# EAGLE board untitled (EAGLE 5.11)
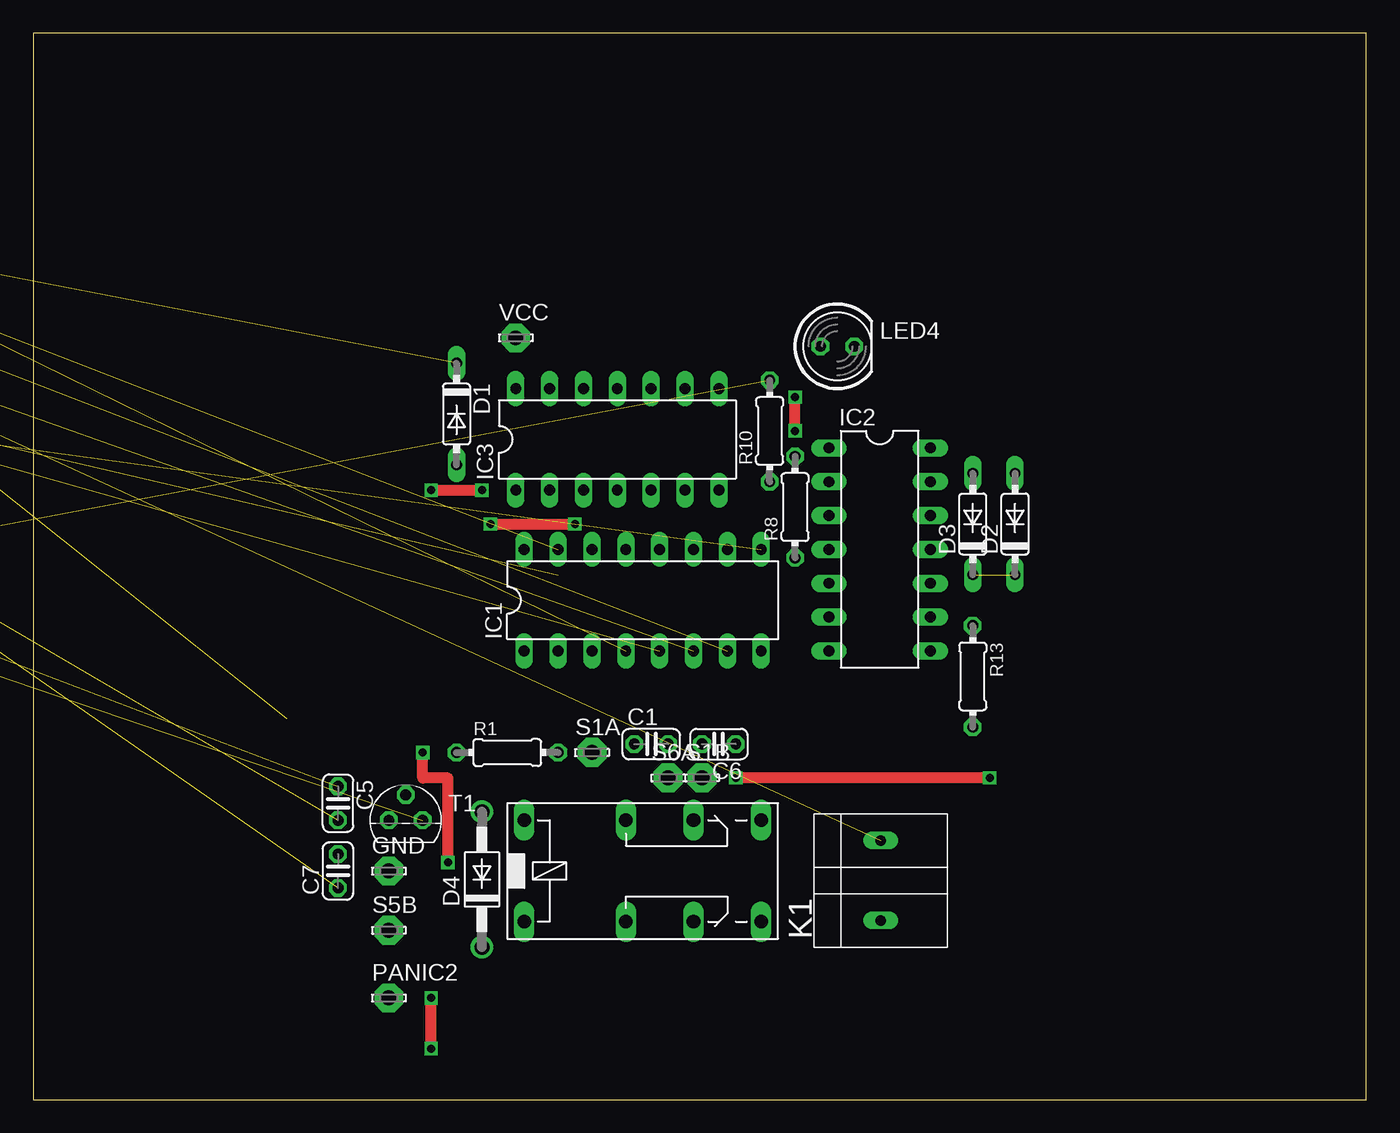
[diagram p0: board, top side]
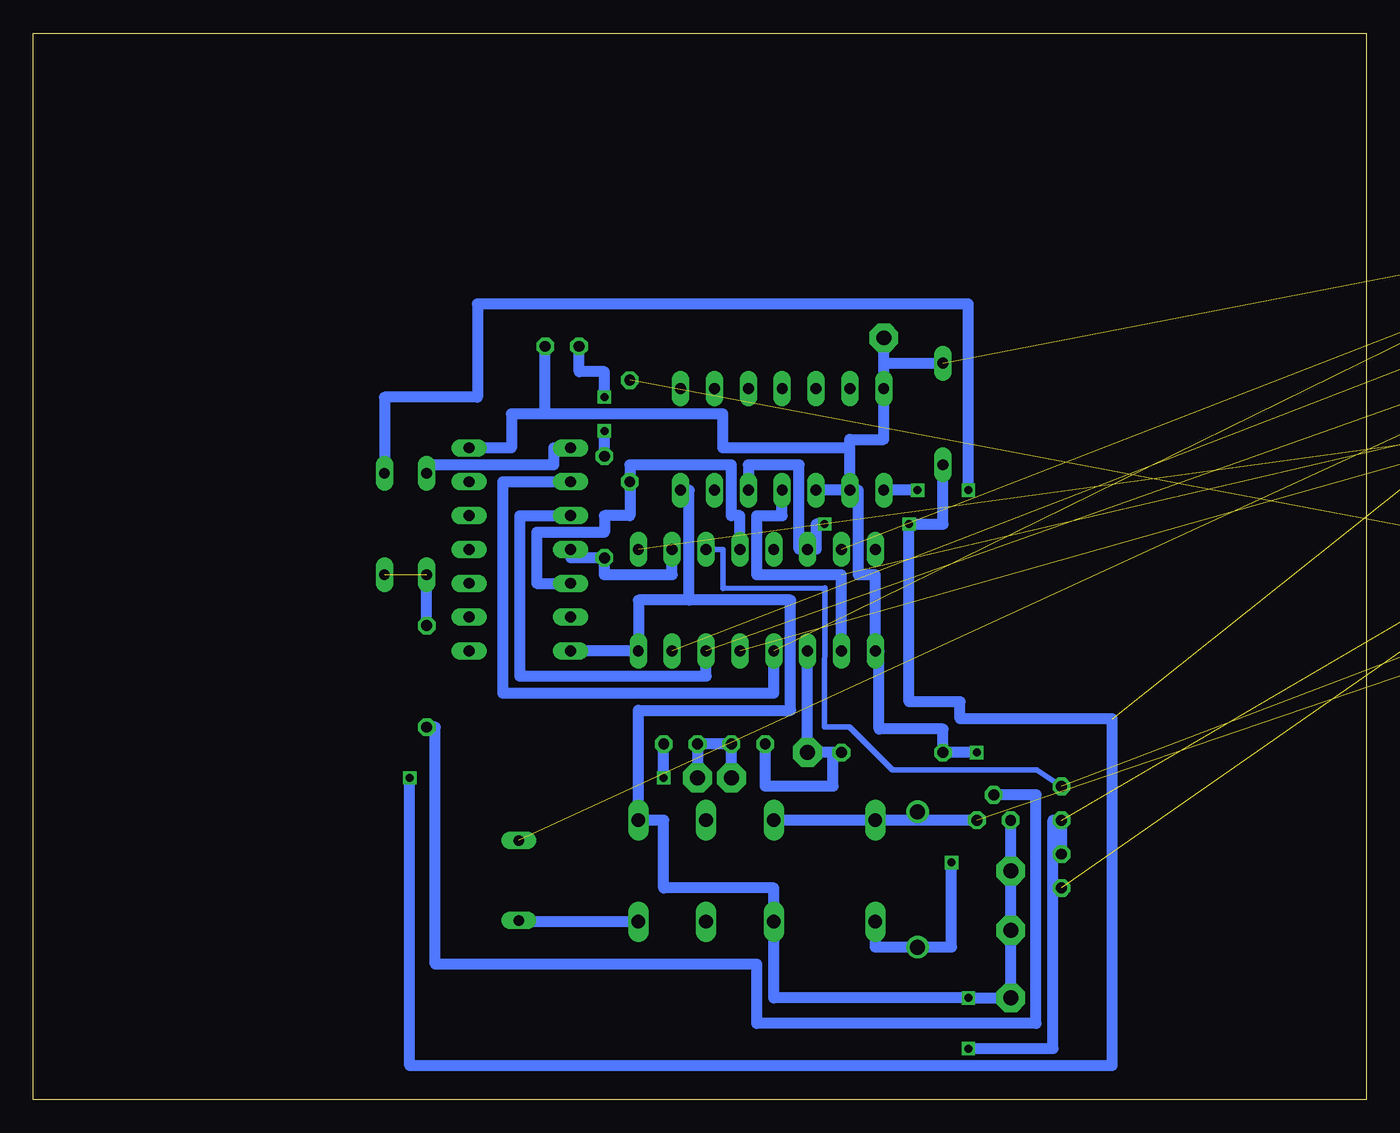
[diagram p1: board, bottom side, seen from below]

Size 100 x 80 mm. Coordinates in mm from the lower left corner, seen from the top.
Outline: 0,0 100,0 100,80 0,80 0,0
Copper layers (1*16): Top 0.035mm / dielectric 1.5mm / Bottom 0.035mm
Design rules "default": minimum track width 10mil, minimum drill 24mil, track to track 8mil, track to pad 8mil, pad to pad 8mil, via to via 8mil, smd to smd 8mil, copper to edge 40mil, drill to drill 8mil, minimum pad ring 10mil, minimum via ring 8mil, stop-mask expansion 4mil, vias tented up to drill 0mil, thermal gap 10mil

## Footprints (pad centres in the part's own frame; a part is rotated, then mirrored left to right if it is on the bottom)
BORNE_2_PCI = drill 0.8 long: P$1 -3.08,-0.08; P$2 2.92,-0.08
C025-024X044 = drill 0.813 octagon: 1 -1.27,0; 2 1.27,0
DO35-7 = drill 0.813 long: A 3.81,0; C -3.81,0
DO41-10 = drill 1.118 round: A 5.08,0; C -5.08,0
LSP11 = drill 1.118 pad 2.159 octagon: MP 0,0
DIL16 = drill 0.813 long: 1 -8.89,-3.81; 2 -6.35,-3.81; 3 -3.81,-3.81; 4 -1.27,-3.81; 5 1.27,-3.81; 6 3.81,-3.81; 7 6.35,-3.81; 8 8.89,-3.81; 9 8.89,3.81; 10 6.35,3.81; 11 3.81,3.81; 12 1.27,3.81; 13 -1.27,3.81; 14 -3.81,3.81; 15 -6.35,3.81; 16 -8.89,3.81
DIL14 = drill 0.813 long: 1 -7.62,-3.81; 2 -5.08,-3.81; 3 -2.54,-3.81; 4 0,-3.81; 5 2.54,-3.81; 6 5.08,-3.81; 7 7.62,-3.81; 8 7.62,3.81; 9 5.08,3.81; 10 2.54,3.81; 11 0,3.81; 12 -2.54,3.81; 13 -5.08,3.81; 14 -7.62,3.81
351 = drill 1.016 long: 1 -3.81,-3.81; 16 -3.81,3.81; O1 8.89,-3.81; O2 8.89,3.81; P1 3.81,-3.81; P2 3.81,3.81; S1 13.97,-3.81; S2 13.97,3.81
LED5MM = drill 0.813 octagon: A -1.27,0; K 1.27,0
0204/7 = drill 0.813 octagon: 1 -3.81,0; 2 3.81,0
TO92 = drill 0.813 octagon: 1 1.27,0; 2 0,1.905; 3 -1.27,0

## Placement (x,y rotation side)
BORNE_2_PCI1  BORNE_2_PCI  [BORNE_2_PCI]  63.5,16.51 90 top
C1  100n  [C025-024X044]  46.35,26.67 0 top
C2  100n  [C025-024X044]  -58.42,36.83 0 top  (outside the outline)
C3  100n  [C025-024X044]  -63.5,36.83 0 top  (outside the outline)
C4  100n  [C025-024X044]  -68.58,36.83 0 top  (outside the outline)
C5  100n  [C025-024X044]  22.86,22.23 270 top
C6  [C025-024X044]  51.44,26.67 180 top
C7  1uF  [C025-024X044]  22.86,17.14 90 top
D1  1N4148DO35-7  [DO35-7]  31.75,51.44 270 top
D2  1N4148DO35-7  [DO35-7]  73.66,43.18 90 top
D3  1N4148DO35-7  [DO35-7]  70.48,43.18 90 top
D4  1N4004  [DO41-10]  33.66,16.51 90 top
GND  LSP11  [LSP11]  26.67,17.14 0 top
IC1  4050N  [DIL16]  45.72,37.47 0 top
IC2  4072N  [DIL14]  63.5,41.27 270 top
IC3  4082N  [DIL14]  43.81,49.53 0 top
K1  351  [351]  40.64,17.14 0 top
LED1  [LED5MM]  -34.29,29.21 0 top  (outside the outline)
LED2  [LED5MM]  -46.99,29.21 0 top  (outside the outline)
LED3  [LED5MM]  -59.69,29.21 0 top  (outside the outline)
LED4  [LED5MM]  60.33,56.52 0 top
LED5  [LED5MM]  -34.29,36.83 0 top  (outside the outline)
LED6  [LED5MM]  -46.99,36.83 0 top  (outside the outline)
PANIC1  LSP11  [LSP11]  -54.61,49.53 0 top  (outside the outline)
PANIC2  LSP11  [LSP11]  26.67,7.62 0 top
R1  100k  [0204/7]  35.56,26.04 0 top
R2  1k  [0204/7]  -49.53,60.96 0 top  (outside the outline)
R3  100k  [0204/7]  -59.69,60.96 0 top  (outside the outline)
R4  1k  [0204/7]  -17.78,66.04 0 top  (outside the outline)
R5  100k  [0204/7]  -27.94,66.04 0 top  (outside the outline)
R6  1k  [0204/7]  -38.1,66.04 0 top  (outside the outline)
R7  100k  [0204/7]  -48.26,66.04 0 top  (outside the outline)
R8  1k  [0204/7]  57.15,44.45 90 top
R9  100k  [0204/7]  -68.58,66.04 0 top  (outside the outline)
R10  1k  [0204/7]  55.24,50.16 90 top
R11  220k  [0204/7]  -27.94,69.85 0 top  (outside the outline)
R12  1k  [0204/7]  -38.1,69.85 0 top  (outside the outline)
R13  10k  [0204/7]  70.48,31.75 270 top
R14  100k  [0204/7]  -58.42,69.85 0 top  (outside the outline)
S1A  LSP11  [LSP11]  41.91,26.04 0 top
S1B  LSP11  [LSP11]  50.16,24.13 0 top
S2A  LSP11  [LSP11]  -31.75,55.88 0 top  (outside the outline)
S2B  LSP11  [LSP11]  -36.83,55.88 0 top  (outside the outline)
S3A  LSP11  [LSP11]  -41.91,55.88 0 top  (outside the outline)
S3B  LSP11  [LSP11]  -46.99,55.88 0 top  (outside the outline)
S4A  LSP11  [LSP11]  -52.07,55.88 0 top  (outside the outline)
S4B  LSP11  [LSP11]  -57.15,55.88 0 top  (outside the outline)
S5A  LSP11  [LSP11]  -62.23,55.88 0 top  (outside the outline)
S5B  LSP11  [LSP11]  26.67,12.7 0 top
S6A  LSP11  [LSP11]  47.62,24.13 0 top
S6B  LSP11  [LSP11]  -21.59,60.96 0 top  (outside the outline)
S8A  LSP11  [LSP11]  -26.67,60.96 0 top  (outside the outline)
S8B  LSP11  [LSP11]  -31.75,60.96 0 top  (outside the outline)
T1  2N3904  [TO92]  27.94,20.95 0 top
VCC  LSP11  [LSP11]  36.2,57.15 0 top

## Library data of the parts
BORNE_2_PCI1 = BORNE_2_PCI
C1-C7 R1-R14 = rcl
D1-D4 = diode
GND PANIC1 PANIC2 S1A S1B S2A S2B S3A S3B S4A S4B S5A S5B S6A S6B S8A S8B VCC = solpad
IC1-IC3 = 40xx
K1 = relay; OC_FARNELL: unknown; OC_NEWARK: unknown
LED1-LED6 = led
T1 = transistor

## Nets
GND: C2.2 C3.2 C4.2 C5.2 C7.2 GND.MP IC1.8 IC2.7 IC3.7 K1.P1 K1.S2 LED6.K PANIC2.MP R14.1 S2B.MP S3B.MP S4B.MP S5B.MP T1.3
N$1: C1.1 IC1.3 R1.2 S1A.MP
N$2: D2.A IC3.1
N$4: LED1.A R2.2
N$5: IC1.2 IC3.4 R2.1
N$6: C2.1 IC1.5 R3.1 S2A.MP
N$7: C6.1 D1.A IC1.14 IC3.5 R11.1 S6B.MP
N$8: IC1.4 IC2.2 R4.1
N$9: LED2.A R4.2
N$10: R13.2 T1.2
N$11: C3.1 IC1.7 R5.1 S3A.MP
N$12: IC1.6 IC2.3 R6.1
N$13: LED3.A R6.2
N$14: D3.A IC2.1
N$15: C4.1 IC1.9 R7.1 S4A.MP
N$16: D2.C D3.C R13.1
N$17: LED4.A R8.2
N$18: IC1.10 IC2.4 R8.1
N$19: BORNE_2_PCI1.P$1 K1.S1
N$20: C5.1 IC1.11 R9.1 S5A.MP
N$21: BORNE_2_PCI1.P$2 S8A.MP
N$22: C7.1 R14.2
N$23: LED5.A R10.2
N$24: IC1.12 IC2.5 R10.1
N$25: LED6.A R12.1
N$26: IC1.15 R12.2
N$27: C1.2 C6.2 S1B.MP S6A.MP
N$28: D4.A K1.16 K1.P2 PANIC1.MP T1.1
VCC: D1.C D4.C IC1.1 IC2.14 IC3.2 IC3.3 IC3.14 K1.1 LED1.K LED2.K LED3.K LED4.K LED5.K R1.1 R3.2 R5.2 R7.2 R9.2 R11.2 S8B.MP VCC.MP

## Tracks (layer width: path | path; a pad name or v marks a point on that pad's centre or on a via)
GND  (via drill 0.6)  (8 unrouted)
  Top 0.813: v29.84,3.81 v29.84,7.62
  Bottom 0.813: IC2.7 IC1.8 54.61,37.47 50.8,37.47 | IC3.7 50.8,45.72 50.8,37.47 | 50.8,37.47 43.18,37.47 43.18,29.21 54.61,29.21 K1.S2 52.7,20.95 52.7,15.88 44.45,15.88 K1.P1 44.45,7.62 v29.84,7.62 PANIC2.MP S5B.MP GND.MP T1.3 | C7.2 C5.2 23.5,20.95 23.5,3.81 v29.84,3.81
N$1
  Bottom 0.813: IC1.3 S1A.MP R1.2 40.01,26.04 40.01,23.5 45.09,23.5 C1.1
N$2  (via drill 0.6)
  Top 0.813: v29.84,45.72 v33.66,45.72
  Bottom 0.813: v33.66,45.72 IC3.1 | v29.84,45.72 29.84,59.69 66.67,59.69 66.67,52.7 73.66,52.7 D2.A
N$4  (1 unrouted)
N$5  (1 unrouted)
  Bottom 0.813: IC1.2 39.37,39.37 45.72,39.37 45.72,43.81 43.81,43.81 IC3.4
N$6  (3 unrouted)
N$7  (via drill 0.6)  (2 unrouted)
  Top 0.813: v34.29,43.18 v40.64,43.18 | v71.75,24.13 v52.7,24.13
  Bottom 0.813: IC3.5 46.35,47.62 42.55,47.62 42.55,41.27 IC1.14 41.27,41.27 41.27,43.18 v40.64,43.18 | D1.A 31.75,43.18 v34.29,43.18 34.29,29.84 30.48,29.84 30.48,28.57 19.05,28.57 19.05,2.54 71.75,2.54 v71.75,24.13 | v52.7,24.13 C6.1
N$8  (1 unrouted)
  Bottom 0.813: IC2.2 64.77,46.35 64.77,30.48 44.45,30.48 IC1.4
N$9  (1 unrouted)
N$10
  Bottom 0.813: T1.2 24.77,22.86 24.77,5.71 45.72,5.71 45.72,10.16 69.85,10.16 69.85,27.94 R13.2
N$11  (3 unrouted)
N$12  (1 unrouted)
  Bottom 0.813: IC1.6 49.53,31.75 63.5,31.75 63.5,43.81 IC2.3
N$13  (1 unrouted)
N$14
  Bottom 0.813: IC2.1 60.96,48.9 60.96,47.62 70.48,47.62 D3.A
N$15  (3 unrouted)
N$16  (1 unrouted)
  Bottom 0.813: R13.1 D3.C
N$17  (via drill 0.6)
  Top 0.813: v57.15,50.16 v57.15,52.7
  Bottom 0.813: R8.2 v57.15,50.16 | v57.15,52.7 57.15,54.61 59.05,54.61 LED4.A
N$18
  Bottom 0.813: IC2.4 59.69,40.64 R8.1 57.15,39.37 52.07,39.37 IC1.10
N$19
  Bottom 0.813: K1.S1 63.58,13.34 BORNE_2_PCI1.P$1
N$20  (2 unrouted)
  Bottom 0.406: IC1.11 48.26,41.27 48.26,38.35 40.59,38.38 40.64,27.94 38.79,27.94 35.56,24.71 24.71,24.71 C5.1
N$21  (1 unrouted)
N$22  (1 unrouted)
N$23  (1 unrouted)
N$24
  Bottom 0.813: IC1.12 46.99,43.81 47.62,43.81 47.62,47.62 55.24,47.62 R10.1 55.24,43.81 57.15,43.81 57.15,42.55 62.23,42.55 62.23,38.73 IC2.5
N$25  (1 unrouted)
N$26  (1 unrouted)
N$27
  Bottom 0.813: S6A.MP C1.2 C6.2 S1B.MP
N$28  (1 unrouted)
  Bottom 0.813: K1.P2 K1.16 33.66,20.95 | 33.66,20.95 D4.A | T1.1 33.66,20.95
VCC  (via drill 0.6)  (10 unrouted)
  Top 0.813: 31.11,18.41 v31.11,17.78 31.11,24.13 29.21,24.13 v29.21,26.04
  Bottom 0.813: IC3.2 38.73,48.9 | 38.73,48.9 38.73,49.53 36.2,49.53 IC3.14 36.2,55.24 | IC3.2 IC3.3 | IC3.2 38.1,45.72 38.1,39.37 36.83,39.37 IC1.1 36.55,33.66 36.55,27.79 31.75,27.79 R1.1 v29.21,26.04 | IC2.14 64.14,48.9 64.14,51.44 61.59,51.44 | 38.73,48.9 48.26,48.9 48.26,51.44 61.59,51.44 | 36.2,55.24 VCC.MP | 61.59,51.44 LED4.K | K1.1 36.83,11.43 D4.C 31.11,11.43 v31.11,17.78 | 36.2,55.24 D1.C